# Altium PCB wave.PcbDoc
Units mm, origin at the board's own origin, x right, y up, seen from the top; angles counter-clockwise.
Board outline 181.48 x 146.05 mm, 2 copper layers (Top Layer, Bottom Layer); 15 components, 27 nets, 96 pads, 0 vias.
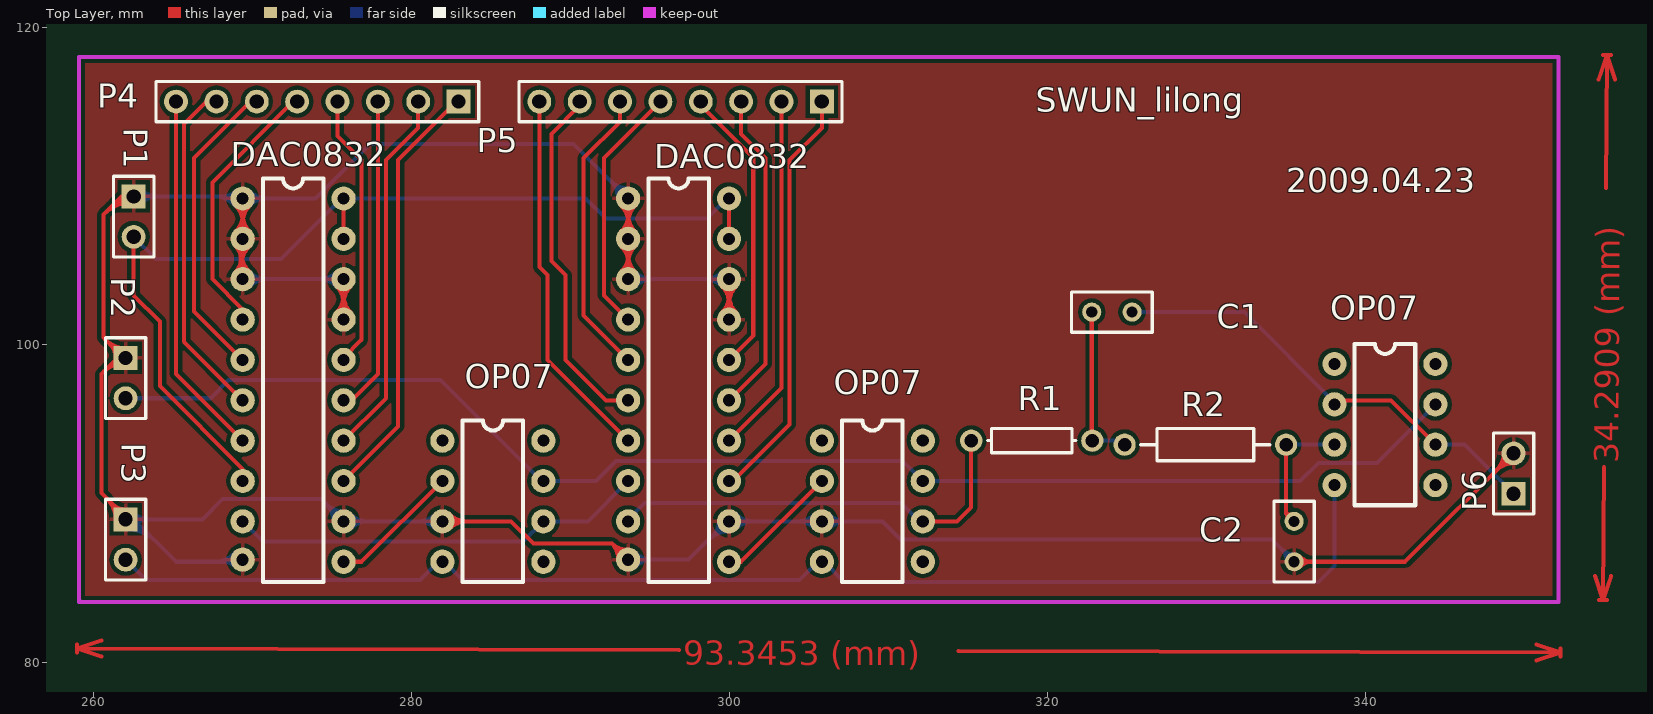
[diagram p0: Top Layer view]
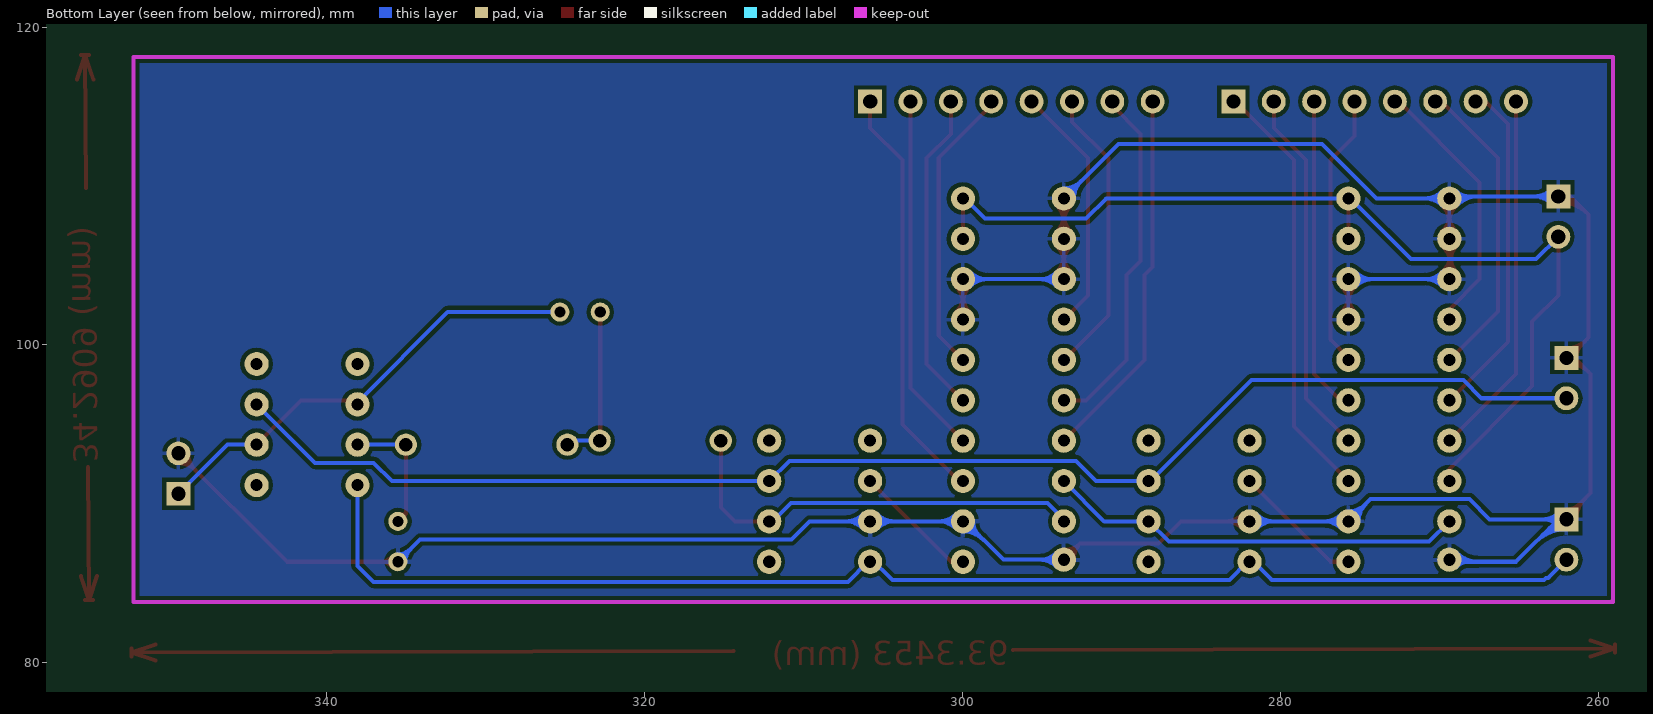
[diagram p1: Bottom Layer view, seen from below]

## Layer stack, top to bottom
Top Layer: signal copper 0.0356
Dielectric: dielectric 0.32, FR-4, Dk 4.8
Bottom Layer: signal copper 0.0356

## Board outline
238.633,146.304 238.633,0.254 420.116,0.254 420.116,145.669 241.935,145.669

## Design rules (kind name [scope] priority, off if disabled: settings)
Clearance [All] p1: gap=0.254
ComponentClearance [All] p1: gap=0.254 collisioncheckmode=0
PolygonConnect [All] p1: connectstyle=Relief reliefconductorwidth=0.254 reliefentries=4 polygonreliefangle="90 Angle"
RoutingVias [All] p1: holewidth=0.711 width=1.27 viastyle="Through Hole" minholewidth=0.711 minwidth=1.27 maxholewidth=0.711 maxwidth=1.27
SolderMaskExpansion [All] p1: expansion=0.102
TestPointUsage [All] p1: valid=0 allowmultiple=FALSE
Testpoint [All] p1: side=15 testpointundercomponent=TRUE minsize=1.016 maxsize=2.54 preferedsize=1.524 minholesize=0 maxholesize=1.016 preferedholesize=0.813 testpointgrid=0.025 style=1023 order=-539222988
Width [All] p1: maxlimit=0.254 minlimit=0.254 preferedwidth=0.254
17 further rules are at their usual default settings.

## Classes and differential pairs
component class wave: C1 C2 DAC0832 OP07 P1 P2 P3 P4 P5 P6 R1 R2

## Components (designator, comment, footprint, x,y, rotation, side; value= is the part's Value field where it differs from the comment)
C1 "Cap" RAD-0.1 324.068,102.072 r0 top
C2 "Cap" RAD-0.1 335.534,87.63 r270 top
DAC0832 "DAC0832" DAC0832 296.164,109.22 r0 top (schematic designator U3)
DAC0832 "DAC0832" DAC0832 271.907,109.22 r0 top
OP07 "0P07" OP07 343.154,111.506 r0 top (schematic designator U5)
OP07 "0P07" OP07 310.896,106.68 r0 top (schematic designator U4)
OP07 "0P07" OP07 287.02,106.68 r0 top (schematic designator U2)
P1 "" HDR1X2 262.509,109.347 r270 top
P2 "" HDR1X2 262.001,99.187 r270 top
P3 "" HDR1X2 262.001,89.027 r270 top
P4 "" HDR1X8 282.956,115.316 r180 top
P5 "" HDR1X8 305.816,115.316 r180 top
P6 "Header 2" HDR1X2 349.341,90.642 r90 top
R1 "" AXIAL-0.3 319.024,93.98 r0 top
R2 "" AXIAL-0.4 329.946,93.726 r0 top

## Footprints (in the part's own frame and the unit in brackets; to place one, negate y for a bottom-side part, rotate by r counter-clockwise, add the part's x,y. Pads: shape width x height; smd on the part's side, far side on the other; paste and mask are expansions set on the pad)
AXIAL-0.3 [mm] "Resistor; 2 Leads"
  round 1.4 hole 0.85: 1(-3.81,0) 2(3.81,0)
  silkscreen extent -2.77,-0.76 2.77,0.76
AXIAL-0.4 [mm] "Resistor; 2 Leads"
  round 1.4 hole 0.85: 1(-5.08,0) 2(5.08,0)
  silkscreen extent -4.06,-1.02 4.06,1.02
DAC0832 [mil]
  round 60 hole 30: 1(-100,0) 2(-100,-100) 3(-100,-200) 4(-100,-300) 5(-100,-400) 6(-100,-500) 7(-100,-600) 8(-100,-700) 9(-100,-800) 10(-100,-895) 11(150,-900) 12(150,-800) 13(150,-700) 14(150,-600) 15(150,-500) 16(150,-400) 17(150,-300) 18(150,-200) 19(150,-100) 20(150,0)
  silkscreen extent -50,-950 100,50
HDR1X2 [mm] "Connector; Header; 2 Position"
  rect 1.5x1.5 hole 0.9: 1(0,0)
  round 1.5 hole 0.9: 2(2.54,0)
  silkscreen extent -1.27,-1.27 3.81,1.27
HDR1X8 [mm] "Connector; Header; 8 Position"
  rect 1.5x1.5 hole 0.9: 1(0,0)
  round 1.5 hole 0.9: 2(2.54,0) 3(5.08,0) 4(7.62,0) 5(10.16,0) 6(12.7,0) 7(15.24,0) 8(17.78,0)
  silkscreen extent -1.27,-1.27 19.05,1.27
OP07 [mil]
  round 60 hole 30: 1(-200,-500) 2(-200,-600) 3(-200,-700) 4(-200,-800) 5(50,-800) 6(50,-700) 7(50,-600) 8(50,-500)
  silkscreen extent -150,-850 0,-450
RAD-0.1 [mm] "Indicating Instrument; 2 Leads"
  round 1.2 hole 0.7: 1(-1.27,0) 2(1.27,0)
  silkscreen extent -2.54,-1.27 2.54,1.27

## Part data
C1 C2: "Capacitor"
OP07 OP07 OP07: library part OP07
P1 P2 P3 P6: library part "Header 2H", "Header, 2-Pin, Right Angle"
P4 P5: library part "Header 8", "Header, 8-Pin"
R1 R2: library part Res2, "Resistor"

## Nets (pads, with @x,y where several pads share a name; then routed paths per layer and width w, separated by ;. In a path a pad name is that pad's centre, name@x,y a point inside that pad or via, vN(x,y) a via of type N, cw(c..) or ccw(c..) an arc to the next point about the centre after c; other vN are vias at no path point)
+5V: DAC0832.8@269.367,91.44 DAC0832.19 DAC0832.20 P1.2 | length 63.8
  Top Layer w0.254: P1.2 262.509,103.124 264.16,101.473 264.16,97.409 269.367,92.202 DAC0832.8@269.367,91.44 ; DAC0832.19@275.717,106.68 DAC0832.20@275.717,109.22 ; DAC0832.19@299.974,106.68 DAC0832.20@299.974,109.22
  Bottom Layer w0.254: P1.2 263.906,105.41 271.78,105.41 DAC0832.20@275.59,109.22 ; DAC0832.20@275.717,109.22 290.957,109.22 292.227,107.95 298.577,107.95 299.847,109.22 DAC0832.20@299.974,109.22
+15V: OP07.7 P2.2 | length 88.8
  Bottom Layer w0.254: P2.2 267.335,96.647 268.478,97.79 281.813,97.79 OP07.7@288.417,91.186 ; OP07.7@288.29,91.44 291.592,91.44 292.862,92.71 310.896,92.71 312.166,91.44 335.915,91.44 337.058,92.583 340.741,92.583 OP07.7@344.424,96.266
-15V: OP07.4 P3.2 | length 84.4
  Bottom Layer w0.254: P3.2 263.144,85.344 263.271,85.344 263.398,85.217 280.543,85.217 281.686,86.36 282.067,86.36 283.21,85.217 304.419,85.217 305.78,86.578 OP07.4@306.034,86.578 ; OP07.4@305.816,86.36 305.943,86.36 307.213,85.09 337.058,85.09 338.074,86.106 OP07.4@338.074,91.186
A0: DAC0832.7@293.624,93.98 P5.8 | length 23.7
  Top Layer w0.254: P5.8 288.036,104.902 288.544,104.394 288.544,99.06 DAC0832.7@293.624,93.98
A1: DAC0832.6@293.624,96.52 P5.7 | length 22.6
  Top Layer w0.254: P5.7 290.576,115.062 288.798,113.284 288.798,105.283 289.687,104.394 289.687,99.06 292.227,96.52 DAC0832.6@293.878,96.52
A2: DAC0832.5@293.624,99.06 P5.6 | length 18.4
  Top Layer w0.254: P5.6 293.116,114.046 290.83,111.76 290.83,101.854 DAC0832.5@293.624,99.06
A3: DAC0832.4@293.624,101.6 P5.5 | length 15.8
  Top Layer w0.254: DAC0832.4@293.624,101.6 292.1,103.124 292.1,111.76 P5.5
A4: DAC0832.16@299.974,99.06 P5.4 | length 18.3
  Top Layer w0.254: P5.4 298.196,115.062 301.498,111.76 301.498,100.584 DAC0832.16@299.974,99.06
A5: DAC0832.15@299.974,96.52 P5.3 | length 20.4
  Top Layer w0.254: DAC0832.15@299.974,96.52 302.26,98.806 302.26,111.76 300.736,113.284 P5.3
A6: DAC0832.14@299.974,93.98 P5.2 | length 22.7
  Top Layer w0.254: DAC0832.14@299.974,93.98 303.276,97.282 P5.2
A7: DAC0832.13@299.974,91.44 P5.1 | length 26.4
  Top Layer w0.254: DAC0832.13@299.974,91.44 300.228,91.44 303.784,94.996 303.784,111.633 305.816,113.665 P5.1
D0: DAC0832.7@269.367,93.98 P4.8 | length 23.2
  Top Layer w0.254: P4.8 265.176,98.171 DAC0832.7@269.367,93.98 ; DAC0832.7@269.621,94.107 DAC0832.7@269.748,94.107
D1: DAC0832.6@269.367,96.52 P4.7 | length 21.5
  Top Layer w0.254: P4.7 267.081,115.316 265.684,113.919 265.684,100.203 DAC0832.6@269.367,96.52
D2: DAC0832.5@269.367,99.06 P4.6 | length 19.4
  Top Layer w0.254: DAC0832.5@269.367,99.06 266.319,102.108 266.319,111.76 269.875,115.316 P4.6
D3: DAC0832.4@269.367,101.6 P4.5 | length 17.2
  Top Layer w0.254: DAC0832.4@269.367,101.6 269.367,102.235 267.462,104.14 267.462,110.236 272.542,115.316 P4.5 ; DAC0832.4@269.367,101.727 DAC0832.4@269.748,101.727
D4: DAC0832.16@275.717,99.06 P4.4 | length 17.4
  Top Layer w0.254: P4.4 275.336,113.157 276.86,111.633 276.86,100.33 275.717,99.187 DAC0832.16@275.717,99.06
D5: DAC0832.15@275.717,96.52 P4.3 | length 19.8
  Top Layer w0.254: DAC0832.15@275.971,96.266 277.876,98.171 P4.3
D6: DAC0832.14@275.717,93.98 P4.2 | length 23.5
  Top Layer w0.254: DAC0832.14@275.59,93.853 278.384,96.647 278.384,111.633 280.416,113.665 P4.2
D7: DAC0832.13@275.717,91.44 P4.1 | length 27.6
  Top Layer w0.254: DAC0832.13@275.59,91.313 279.146,94.869 279.146,111.633 282.829,115.316 P4.1 ; DAC0832.13@275.717,91.44 DAC0832.13@275.971,91.44 ; DAC0832.13@276.098,91.567 DAC0832.13@276.225,91.694
GND: C2.2 DAC0832.1 DAC0832.2 DAC0832.3 DAC0832.10 DAC0832.12 DAC0832.17 DAC0832.18 OP07.3@281.94,88.9 OP07.3@305.816,88.9 P1.1 P2.1 P3.1 P6.2 | length 338.4
  Top Layer w0.254: 260.617,98.311 cw(c261.853,97.075) P2.1@261.975,98.819 ; 260.64,108.24 cw(c262.425,106.454) P1.1@262.498,108.978 ; 260.721,100.34 ccw(c262.001,101.621) P2.1@262.001,99.81 ; 260.848,90.307 cw(c259.567,89.027) P3.1@261.378,89.027 ; 261.011,98.705 cw(c261.905,97.812) P2.1@261.993,99.072 ; 261.027,100.034 cw(c260.181,99.187) P2.1@261.378,99.187 ; 261.056,108.656 cw(c262.449,107.263) P1.1@262.506,109.232 ; 261.154,90.001 ccw(c262.001,90.847) P3.1@262.001,89.65 ; 261.154,99.907 ccw(c262.001,100.753) P2.1@262.001,99.556 ; 261.281,89.874 cw(c260.435,89.027) P3.1@261.632,89.027 ; 261.472,109.072 cw(c262.472,108.073) P1.1@262.513,109.486 ; P1.1@261.898,109.223 ccw(c261.747,109.193) 261.747,109.347 ; P1.1@261.898,109.471 cw(c261.747,109.501) 261.747,109.347 ; P2.1 261.493,99.187 260.477,98.171 260.477,90.678 P3.1@262.382,88.773 ; P2.1@262.128,98.933 260.604,100.457 260.604,108.204 261.747,109.347 ; P1.1@262.255,109.22 P1.1@262.763,109.22 ; P1.1 261.747,109.347 ; DAC0832.3@268.918,104.589 ccw(c268.141,105.366) 269.24,105.366 ccw(c270.593,105.366) DAC0832.3@269.636,104.409 ; DAC0832.2@268.918,106.231 cw(c268.141,105.454) 269.24,105.454 cw(c270.593,105.454) DAC0832.2@269.636,106.411 ; DAC0832.2@268.918,107.129 ccw(c267.834,108.213) 269.367,108.213 ccw(c270.9,108.213) DAC0832.2@269.816,107.129 ; DAC0832.1@268.918,108.771 cw(c267.834,107.687) 269.367,107.687 cw(c270.9,107.687) DAC0832.1@269.816,108.771 ; DAC0832.2@269.098,106.949 ccw(c268.447,107.6) 269.367,107.6 ccw(c270.287,107.6) DAC0832.2@269.636,106.949 ; DAC0832.1@269.098,108.951 cw(c268.447,108.3) 269.367,108.3 cw(c270.287,108.3) DAC0832.1@269.636,108.951 ; DAC0832.3@269.24,104.84 cw(c271.207,104.84) DAC0832.2@269.816,106.231 ; DAC0832.2@269.24,105.98 ccw(c271.207,105.98) DAC0832.3@269.816,104.589 ; DAC0832.3@269.367,104.14 269.24,104.267 269.24,106.553 269.367,106.68 DAC0832.1@269.367,109.22 ; DAC0832.17@275.268,102.049 ccw(c274.184,103.133) 275.717,103.133 ccw(c277.25,103.133) DAC0832.17@276.166,102.049 ; DAC0832.18@275.268,103.691 cw(c274.184,102.607) 275.717,102.607 cw(c277.25,102.607) DAC0832.18@276.166,103.691 ; DAC0832.17@275.448,101.869 ccw(c274.797,102.52) 275.717,102.52 ccw(c276.637,102.52) DAC0832.17@275.986,101.869 ; DAC0832.18@275.448,103.871 cw(c274.797,103.22) 275.717,103.22 cw(c276.637,103.22) DAC0832.18@275.986,103.871 ; DAC0832.12@275.463,88.9 DAC0832.12@275.717,88.9 ; DAC0832.17@275.717,101.473 DAC0832.18@275.717,104.14 ; OP07.3@281.94,88.9 286.258,88.9 287.655,87.503 292.608,87.503 ; OP07.3@282.209,88.631 cw(c282.86,87.98) 282.86,88.9 cw(c282.86,89.82) OP07.3@282.209,89.169 ; OP07.3@282.389,88.451 cw(c283.473,87.367) 283.473,88.9 cw(c283.473,90.433) OP07.3@282.389,89.349 ; DAC0832.10@292.99,86.517 ccw(c291.683,86.578) 292.608,87.503 ; DAC0832.3@293.175,104.589 ccw(c292.091,105.673) 293.624,105.673 ccw(c295.157,105.673) DAC0832.3@294.073,104.589 ; DAC0832.2@293.175,106.231 cw(c292.091,105.147) 293.624,105.147 cw(c295.157,105.147) DAC0832.2@294.073,106.231 ; DAC0832.2@293.175,107.129 ccw(c292.091,108.213) 293.624,108.213 ccw(c295.157,108.213) DAC0832.2@294.073,107.129 ; DAC0832.1@293.175,108.771 cw(c292.091,107.687) 293.624,107.687 cw(c295.157,107.687) DAC0832.1@294.073,108.771 ; DAC0832.10@293.243,86.505 ccw(c292.46,86.542) 293.014,87.097 ccw(c293.569,87.651) DAC0832.10@293.606,86.868 ; DAC0832.3@293.355,104.409 ccw(c292.704,105.06) 293.624,105.06 ccw(c294.544,105.06) DAC0832.3@293.893,104.409 ; DAC0832.2@293.355,106.411 cw(c292.704,105.76) 293.624,105.76 cw(c294.544,105.76) DAC0832.2@293.893,106.411 ; DAC0832.2@293.355,106.949 ccw(c292.704,107.6) 293.624,107.6 ccw(c294.544,107.6) DAC0832.2@293.893,106.949 ; DAC0832.1@293.355,108.951 cw(c292.704,108.3) 293.624,108.3 cw(c294.544,108.3) DAC0832.1@293.893,108.951 ; DAC0832.10@293.594,87.121 cw(c293.533,88.428) 292.608,87.503 ; DAC0832.10@293.624,86.487 292.608,87.503 ; DAC0832.3@293.624,104.14 DAC0832.1@293.624,109.22 ; DAC0832.17@299.525,102.049 ccw(c298.441,103.133) 299.974,103.133 ccw(c301.507,103.133) DAC0832.17@300.423,102.049 ; DAC0832.18@299.525,103.691 cw(c298.441,102.607) 299.974,102.607 cw(c301.507,102.607) DAC0832.18@300.423,103.691 ; DAC0832.17@299.705,101.869 ccw(c299.054,102.52) 299.974,102.52 ccw(c300.894,102.52) DAC0832.17@300.243,101.869 ; DAC0832.18@299.705,103.871 cw(c299.054,103.22) 299.974,103.22 cw(c300.894,103.22) DAC0832.18@300.243,103.871 ; DAC0832.17@299.974,101.6 DAC0832.18@299.974,104.14 ; C2.2 342.519,86.36 P6.2 ; C2.2@335.868,86.026 cw(c336.676,85.218) 336.676,86.36 cw(c336.676,87.502) C2.2@335.868,86.694 ; P6.2@348.718,93.182 cw(c347.214,93.182) 348.278,92.119 cw(c349.341,91.055) P6.2@349.341,92.559 ; P6.2@348.972,93.182 cw(c348.082,93.182) 348.711,92.552 cw(c349.341,91.923) P6.2@349.341,92.813
  Bottom Layer w0.254: P3.1@262.001,88.404 cw(c262.001,85.674) 263.932,87.604 ; P3.1@262.001,88.658 cw(c262.001,86.541) 263.498,88.038 ; P3.1@262.001,88.912 cw(c262.001,87.408) 263.065,88.471 ; P3.1 266.827,89.027 268.097,90.297 274.32,90.297 275.717,88.9 OP07.3@281.94,88.9 ; P1.1@262.001,109.347 269.24,109.347 269.367,109.22 273.939,109.22 277.368,112.649 290.195,112.649 DAC0832.1@293.624,109.22 ; P3.1@262.262,88.766 cw(c262.892,88.136) 262.892,89.027 cw(c262.892,89.918) P3.1@262.262,89.288 ; P3.1@262.442,88.586 cw(c263.505,87.523) 263.505,89.027 cw(c263.505,90.531) P3.1@262.442,89.468 ; P3.1@262.509,89.027 265.176,86.36 269.24,86.36 DAC0832.10@269.367,86.487 ; P1.1@262.77,109.086 cw(c263.4,108.456) 263.4,109.347 cw(c263.4,110.238) P1.1@262.77,109.608 ; P1.1@262.95,108.906 cw(c264.013,107.843) 264.013,109.347 cw(c264.013,110.851) P1.1@262.95,109.788 ; 267.527,86.36 ccw(c267.527,88.327) DAC0832.10@268.918,86.936 ; 267.527,109.347 cw(c267.527,107.38) DAC0832.1@268.918,108.771 ; DAC0832.10@268.918,86.038 ccw(c268.141,85.261) 268.141,86.36 ccw(c268.141,87.713) DAC0832.10@269.098,86.756 ; DAC0832.1@268.918,109.669 cw(c268.141,110.446) 268.141,109.347 cw(c268.141,107.994) DAC0832.1@269.098,108.951 ; DAC0832.3@269.367,104.14 DAC0832.18@275.971,104.14 ; DAC0832.3@269.636,103.871 cw(c270.287,103.22) 270.287,104.14 cw(c270.287,105.06) DAC0832.3@269.636,104.409 ; DAC0832.1@269.636,108.951 cw(c270.287,108.3) 270.287,109.22 cw(c270.287,110.14) DAC0832.1@269.636,109.489 ; DAC0832.3@269.816,103.691 cw(c270.9,102.607) 270.9,104.14 cw(c270.9,105.673) DAC0832.3@269.816,104.589 ; DAC0832.1@269.816,108.771 cw(c270.9,107.687) 270.9,109.22 cw(c270.9,110.753) DAC0832.1@269.816,109.669 ; DAC0832.12@275.082,88.9 ccw(c273.549,88.9) 274.633,89.984 ccw(c275.717,91.068) DAC0832.12@275.717,89.535 ; DAC0832.18@275.268,103.691 ccw(c274.184,102.607) 274.184,104.14 ccw(c274.184,105.673) DAC0832.18@275.268,104.589 ; DAC0832.12@275.336,88.9 ccw(c274.416,88.9) 275.067,89.55 ccw(c275.717,90.201) DAC0832.12@275.717,89.281 ; DAC0832.18@275.448,103.871 ccw(c274.797,103.22) 274.797,104.14 ccw(c274.797,105.06) DAC0832.18@275.448,104.409 ; DAC0832.12@275.986,88.631 cw(c276.637,87.98) 276.637,88.9 cw(c276.637,89.82) DAC0832.12@275.986,89.169 ; DAC0832.12@276.166,88.451 cw(c277.25,87.367) 277.25,88.9 cw(c277.25,90.433) DAC0832.12@276.166,89.349 ; OP07.3@281.491,88.451 ccw(c280.407,87.367) 280.407,88.9 ccw(c280.407,90.433) OP07.3@281.491,89.349 ; OP07.3@281.671,88.631 ccw(c281.02,87.98) 281.02,88.9 ccw(c281.02,89.82) OP07.3@281.671,89.169 ; DAC0832.1@292.989,109.22 ccw(c291.456,109.22) 292.54,110.304 ccw(c293.624,111.388) DAC0832.1@293.624,109.855 ; DAC0832.1@293.243,109.22 ccw(c292.323,109.22) 292.974,109.87 ccw(c293.624,110.521) DAC0832.1@293.624,109.601 ; DAC0832.10@293.624,86.487 297.434,86.487 DAC0832.12@300.101,89.154 ; DAC0832.3@293.624,104.14 DAC0832.18@299.974,104.14 ; DAC0832.10@293.893,86.218 cw(c294.544,85.567) 294.544,86.487 cw(c294.544,87.407) DAC0832.10@293.893,86.756 ; DAC0832.3@293.893,103.871 cw(c294.544,103.22) 294.544,104.14 cw(c294.544,105.06) DAC0832.3@293.893,104.409 ; DAC0832.10@294.073,86.038 cw(c295.157,84.954) 295.157,86.487 cw(c295.157,88.02) DAC0832.10@294.073,86.936 ; DAC0832.3@294.073,103.691 cw(c295.157,102.607) 295.157,104.14 cw(c295.157,105.673) DAC0832.3@294.073,104.589 ; 298.673,87.726 cw(c299.974,86.425) DAC0832.12@299.974,88.265 ; 298.98,88.033 ccw(c298.113,88.9) DAC0832.12@299.339,88.9 ; 299.107,88.16 cw(c299.974,87.293) DAC0832.12@299.974,88.519 ; DAC0832.18@299.525,103.691 ccw(c298.441,102.607) 298.441,104.14 ccw(c298.441,105.673) DAC0832.18@299.525,104.589 ; DAC0832.18@299.705,103.871 ccw(c299.054,103.22) 299.054,104.14 ccw(c299.054,105.06) DAC0832.18@299.705,104.409 ; DAC0832.12@299.974,88.9 309.626,88.9 310.769,87.757 334.137,87.757 C2.2 ; DAC0832.12@300.243,88.631 cw(c300.894,87.98) 300.894,88.9 cw(c300.894,89.82) DAC0832.12@300.243,89.169 ; DAC0832.12@300.423,88.451 cw(c301.507,87.367) 301.507,88.9 cw(c301.507,90.433) DAC0832.12@300.423,89.349 ; OP07.3@305.367,88.451 ccw(c304.283,87.367) 304.283,88.9 ccw(c304.283,90.433) OP07.3@305.367,89.349 ; OP07.3@305.547,88.631 ccw(c304.896,87.98) 304.896,88.9 ccw(c304.896,89.82) OP07.3@305.547,89.169 ; OP07.3@306.07,88.9 OP07.3@306.197,88.773 ; OP07.3@306.085,88.631 cw(c306.736,87.98) 306.736,88.9 cw(c306.736,89.82) OP07.3@306.085,89.169 ; OP07.3@306.265,88.451 cw(c307.349,87.367) 307.349,88.9 cw(c307.349,90.433) OP07.3@306.265,89.349 ; C2.2@335.061,86.36 ccw(c333.919,86.36) 334.727,87.167 ccw(c335.534,87.975) C2.2@335.534,86.833
NetC1_1: C1.1 R1.2 R2.1 | length 10.4
  Top Layer w0.254: R1.2@322.798,93.436 C1.1
  Bottom Layer w0.254: R1.2 R2.1@324.612,93.98
NetC2_1: C2.1 OP07.3@338.074,93.726 R2.2 | length 8.8
  Top Layer w0.254: R2.2 335.026,89.408 ; C2.1@335.095,89.075 ccw(c334.807,89.189) 335.026,89.408 ; C2.1@335.359,89.339 cw(c335.245,89.627) 335.026,89.408 ; C2.1 335.026,89.408
  Bottom Layer w0.254: R2.2 OP07.3@338.074,93.726
NetR1_1: DAC0832.9@293.624,88.9 OP07.6@312.166,88.9 R1.1 | length 27
  Top Layer w0.254: OP07.6@312.166,88.9 314.325,88.9 315.214,89.789 R1.1
  Bottom Layer w0.254: DAC0832.9@293.624,88.9 293.624,89.027 294.64,90.043 310.769,90.043 310.791,90.065 OP07.6@311.956,88.9
NetU1_9: DAC0832.8@293.624,91.44 DAC0832.9@269.367,88.9 OP07.6@288.29,88.9 | length 26.5
  Bottom Layer w0.254: DAC0832.9@269.367,88.9 270.637,87.63 287.02,87.63 288.29,88.9 291.084,88.9 293.624,91.44 DAC0832.8@293.497,91.44
NetU1_11: DAC0832.11@275.717,86.36 OP07.2@281.94,91.44 | length 8.7
  Top Layer w0.254: DAC0832.11@275.717,86.36 276.86,86.36 OP07.2@281.94,91.44
  Bottom Layer w0.254: DAC0832.11@275.717,86.36 DAC0832.11@275.717,86.741
NetU3_11: DAC0832.11@299.974,86.36 OP07.2@305.816,91.44 | length 8.1
  Top Layer w0.254: DAC0832.11@299.974,86.36 300.736,86.36 OP07.2@305.816,91.44
  Bottom Layer w0.254: OP07.2@306.034,91.658 OP07.2@306.034,91.785
VOUT: C1.2 OP07.2@338.074,96.266 OP07.6@344.424,93.726 P6.1 | length 29.2
  Top Layer w0.254: OP07.2@338.074,96.52 341.63,96.52 OP07.6@344.424,93.726
  Bottom Layer w0.254: C1.2 332.395,102.072 338.074,96.393 OP07.2@338.074,96.266 ; OP07.6@344.424,93.726 346.258,93.726 P6.1 P6.1@349.087,90.642
pads on no net: OP07.1 OP07.5 OP07.8
copper on no net: | length 107.4
  Top Layer w0.254: 258.952,80.645 258.954,81.153 ; 260.476,80.387 258.953,80.899 ; 260.478,81.403 258.953,80.899 ; 296.84,80.796 258.953,80.899 ; 314.411,80.748 352.298,80.645 ; 350.773,80.141 352.298,80.645 ; 350.775,81.157 352.298,80.645 ; 352.297,80.391 352.299,80.899 ; 354.468,85.475 354.965,83.947 ; 354.7,116.717 355.219,118.237 ; 354.711,83.949 355.219,83.945 ; 354.965,118.239 355.473,118.235 ; 355.027,92.307 354.965,83.947 ; 355.157,109.877 355.219,118.237 ; 355.484,85.467 354.965,83.947 ; 355.716,116.709 355.219,118.237

## Polygon pours and split planes (outlines as drawn)
GND on Top Layer (solid): 259.059,118.131 352.15,118.131 352.15,83.968 259.059,83.968
GND on Bottom Layer (solid): 259.207,118.11 259.207,83.947 351.79,83.947 351.79,118.11

## Keep-outs
Keep-Out Layer:
  lines w0.254: 259.08,83.82 352.171,83.82 352.171,108.458 352.171,118.11 342.519,118.11 314.071,118.11 307.848,118.11 298.577,118.11 285.242,118.11 259.08,118.11 259.08,83.947 259.207,83.82

## Other copper
Top Layer:
  text "34.2909 (mm)" at 355.943,92.554 h1.52 r89.58
  text "93.3453 (mm)" at 297.091,79.881 h1.52 r359.84

## Silkscreen, mask and mechanical layers (free items; w line width, h text height)
Top Overlay:
  text "SWUN_lilong" at 319.278,114.681 h1.52
  text "2009.04.23" at 335.026,109.601 h1.52